# Altium PCB 板.PcbDoc (part 3 of 4)
Units mm, origin at the board's own origin, x right, y up, seen from the top; angles counter-clockwise.
Board outline 152.4 x 101.6 mm, 4 copper layers (Top Layer, VCC, GND, Bottom Layer); 183 components, 548 nets, 1331 pads, 689 vias.
Unrouted connection lines stored in the file: 6.
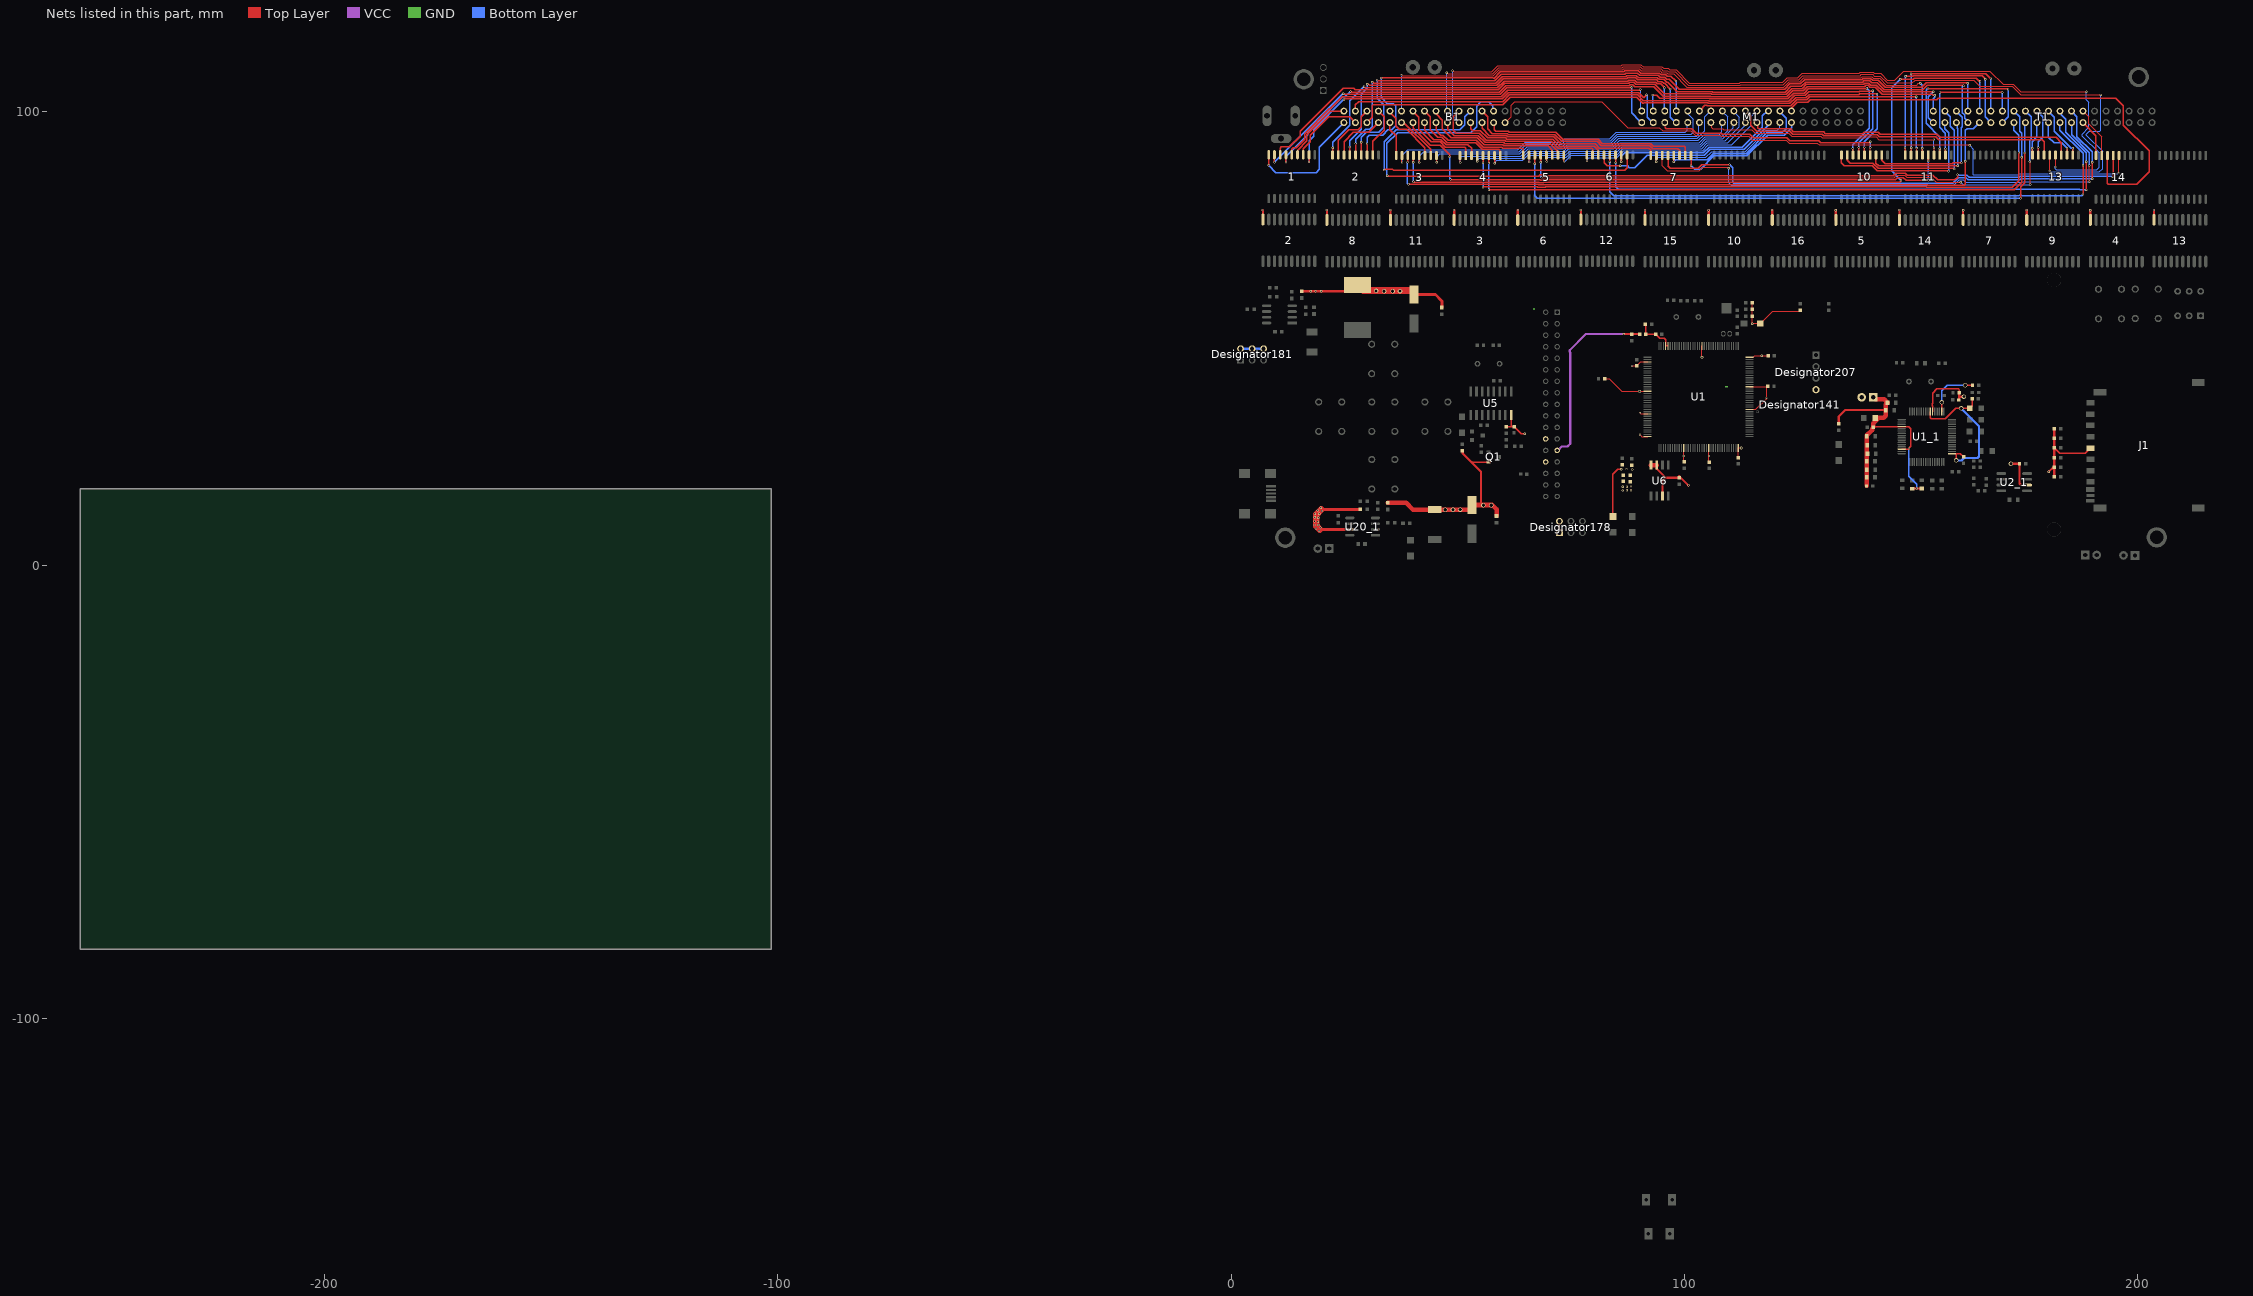
[diagram p5: the nets of this part, all layers, seen from the top]

## Via types
v1: diameter 0.5, hole 0.3, Top Layer to Bottom Layer, 646 vias
v2: diameter 1, hole 0.711, Top Layer to Bottom Layer, 35 vias
v3: diameter 0.5, hole 0.4, Top Layer to Bottom Layer, 2 vias
v4: diameter 1.27, hole 1.016, Top Layer to Bottom Layer, 2 vias
v5: diameter 1, hole 1, Top Layer to Bottom Layer, 2 vias
v6: diameter 3, hole 3, Top Layer to Bottom Layer, tented both sides, 2 vias

## Nets (pads, with @x,y where several pads share a name; then routed paths per layer and width w, separated by ;. In a path a pad name is that pad's centre, name@x,y a point inside that pad or via, vN(x,y) a via of type N, cw(c..) or ccw(c..) an arc to the next point about the centre after c; other vN are vias at no path point) (continued)
VCC3.3: C3_2.2 C4_2.1 C41.1 C42.2 C44.2 Designator141.24 Designator141.25 Designator178.1 Designator178.2 Designator207.4 J1.4 L8_1.2 P3_3.2 Q1.1 R3.2@90.069,50.902 R6_2.2 R10.1 R11.1 R20.1 R22.2 R24.2 R25.2 R27.2 R28.2 U6.3 U6.7 U6.8 | length 126.4
  Top Layer w0.3: 53.035,22.631 56.976,22.631 Q1.1@57.093,22.748 ; Designator178.1@72.39,7.112 Designator178.2@72.39,9.652 ; U6.7@93.853,21.209 U6.7@93.853,22.047 ; C41.1@98.806,19.228 C41.1@98.806,19.558 ; v1@100.787,17.577 v1(100.863,17.577) ; Designator207.4@128.524,38.202 Designator207.4@128.981,38.659 ; R27.2@181.342,21.576 R27.2@181.547,21.576 ; R25.2@181.547,25.813 182.722,24.638 188.34,24.638 J1.4@189.493,25.791
  Top Layer w0.5: v1(86.589,50.927) 90.044,50.927 R3.2@90.069,50.902 ; U6.7@93.853,21.209 95.834,19.228 ; U6.3@95.125,15.189 95.125,18.518 95.834,19.228 ; C41.1@98.806,19.228 95.834,19.228 ; C41.1@98.806,19.558 v1@100.787,17.577 ; v1(180.34,20.574) R27.2@181.342,21.576 ; R28.2@181.547,19.458 R27.2@181.547,21.576 C42.2@181.547,23.695 R25.2@181.547,25.813 R24.2@181.547,27.931 R22.2@181.547,30.05
  Top Layer w0.508: R20.1@50.925,25.209 51.052,25.082 51.052,24.614 53.035,22.631 55.118,20.549 55.118,13.335 v2@55.22,13.233
  Top Layer w1: R6_2.2@34.493,13.741 38.575,13.741 40.101,12.215 L8_1.2@44.933,12.215 47.219,12.215 48.92,12.215 v2(50.546,12.215) 52.637,12.215 53.137,12.715 C4_2.1@53.137,13.233 55.22,13.233 57.353,13.233 57.594,13.233 58.522,12.306 C3_2.2@58.522,10.822 ; U6.8@92.583,22.047 U6.7@93.853,22.047
  VCC w0.5: Designator141.25@71.901,25.275 72.091,25.275 72.932,26.116 74.173,26.116 74.778,26.721 74.778,46.852 74.662,46.968 74.662,47.382 78.207,50.927 v1(86.589,50.927)
  GND w0.3: 108.966,39.37 109.474,39.37
  other v1: 86.385,16.408 88.189,16.459 87.274,16.485 86.385,17.247 87.274,17.272 88.189,17.297
  other v2: 47.219,12.167 48.92,12.167 55.626,13.183 57.353,13.183
VCC3.3M: C11.1 C12.1 C13.1 C14.1 C15.1 C16.1 C17.1 C18.1 C19.1 C20.1 C21.1 C22.1 D1.1 D1_2.1 pad.15 pad.38 pad.41 R10.2 R11.2 R21.1 U1.17 U1.39 U1.52 U1.62 U1.72 U1.84 U1.95 U1.108 U1.121 U1.131 U1.144 | length 73.8
  Top Layer w0.254: C18.1@82.398,41.072 83.337,41.072 86.131,38.278 pad.38@90.068,38.278 90.102,38.312 U1.52@91.823,38.312 ; R10.2@87.987,19.774 R10.2@88,19.787 ; v1(88.392,43.917) C20.1@89.408,43.917 90.303,44.812 U1.39@91.823,44.812 ; v1(90.145,33.503) 90.336,33.312 U1.62@91.823,33.312 ; v1(90.17,28.743) 90.602,28.312 U1.72@91.823,28.312 ; U1.84@99.823,25.812 99.823,22.783 C17.1@100.051,22.555 ; pad.15@103.823,45.834 U1.17@103.823,48.312 ; U1.95@105.323,25.812 105.323,22.82 C16.1@105.461,22.682 ; C15.1@112.065,23.444 C15.1@111.823,23.686 U1.108@111.823,25.812 pad.41@112.491,25.812 ; U1.121@114.323,34.312 115.744,34.312 118.085,36.652 v1(118.085,36.855) 118.085,39.141 C11.1@118.255,39.312 ; U1.131@114.323,39.312 C11.1@118.255,39.312 ; U1.144@114.323,45.812 115.096,45.812 115.436,46.152 v1(117.018,46.152) 118.186,46.152 C12.1@118.44,45.898 ; C14.1@114.91,57.836 C19.1@114.91,56.388 C13.1@114.91,54.839 v1(114.91,53.188) 115.011,53.289 D1.1@116.688,53.289 116.967,53.569 117.067,53.569 119.48,55.982 125.247,55.982 R21.1@125.501,56.236 ; C11.1@118.339,39.395 C11.1@118.255,39.312
  Top Layer w0.3: D1_2.1@84.15,11.151 84.15,20.041 85.242,21.133 v1(86.03,21.133)
  other v1: 88.468,21.057 87.183,21.158 105.385,24.028 99.822,24.054
VCC5: 2.20 3.20 4.20 5.20 6.20 7.20 8.20 9.20 10.20 11.20 12.20 13.20 14.20 15.20 16.20 C3.2@46.431,56.796 C4.1@40.361,59.639 C32.1 C43.1 Designator141.28 Designator181.2 Designator181.4 Designator181.6 L8.2 R1_2.2 R6.1 U5.16 U20_1.7 | length 99.6
  Top Layer w0.3: C32.1@60.681,30.48 61.595,30.48 ; U5.16@61.747,33.036 61.747,30.632 61.595,30.48 ; C43.1@62.357,30.48 61.595,30.48 ; C43.1@62.382,30.505 63.932,28.956 v1(64.77,28.956)
  Top Layer w0.5: v1(6.934,78.283) 7.01,78.207 2.20@7.01,76.203 ; 8.20@21.11,76.101 v1@21.11,78.254 ; v1(35.077,78.283) 35.142,78.218 11.20@35.142,76.101 ; 3.20@49.174,76.101 v1@49.174,78.233 ; 6.20@63.206,76.101 v1@63.206,78.242 ; 12.20@77.14,76.203 v1@77.14,78.257 ; v1(91.262,78.257) 91.269,78.251 15.20@91.269,76.101 ; 10.20@105.301,76.101 v1@105.301,78.24 ; 16.20@119.332,76.101 v1@119.332,78.229 ; 5.20@133.364,76.101 v1@133.364,78.218 ; 14.20@147.396,76.101 v1@147.396,78.258 ; 7.20@161.427,76.101 v1@161.427,78.242 ; 9.20@175.459,76.101 175.459,78.253 v1(175.489,78.283) ; 4.20@189.491,76.101 v1@189.491,78.225 ; 13.20@203.53,76.126 v1@203.53,78.257
  Top Layer w0.635: R6.1@15.557,60.39 R6.1@15.545,60.377 26.472,60.377 L8.2@27.889,61.794 ; 19.533,7.849 U20_1.7@26.165,7.849 ; 19.863,12.268 R1_2.2@28.499,12.268 ; C4.1@40.361,59.639 45.034,59.639 46.457,58.217 46.457,56.821 C3.2@46.431,56.796
  Top Layer w1: L8.2@27.889,61.794 L8.2@29.139,60.544 ; C4.1@39.861,60.544 40.361,60.044 C4.1@40.361,59.639
  Top Layer w1.5: 19.533,7.849 18.771,8.611 18.771,11.176 19.863,12.268 ; L8.2@29.139,60.544 C4.1@39.861,60.544
  Bottom Layer w0.635: Designator181.2@2.083,47.701 Designator181.4@4.623,47.701 Designator181.6@7.163,47.701
  other v1: 19.355,7.518 18.694,8.077 19.685,8.255 19.177,8.814 18.364,8.839 19.126,9.55 18.364,9.652 19.177,10.414 18.415,10.516 19.406,11.278 18.466,11.298 20.015,11.913 19.101,12.04 19.761,12.624 18.618,60.35 19.837,60.35 17.551,60.376 105.283,78.257 133.325,78.257 161.442,78.257 189.459,78.257 21.082,78.283 49.124,78.283 63.246,78.283 77.114,78.283 119.278,78.283 147.371,78.283 203.505,78.283
  other v2: 35.611,60.376 33.731,60.401 37.236,60.427 31.953,60.452
VDD12: C2_1.2 C8_1.1 C9_1.2 U1_1.1 U1_1.23 | length 34.5
  Top Layer w0.254: C8_1.1@162.852,34.658 C8_1.1@162.916,34.595
  Top Layer w0.3: U1_1.23@154.191,33.846 154.191,32.485 154.367,32.309 157.505,32.309 159.766,34.569 160.998,34.569 162.763,34.569 C8_1.1@162.852,34.658 ; v2(159.893,23.063) 159.893,24.546 160.813,24.546 C2_1.2@161.52,23.838 ; C8_1.1@162.916,34.595 163.401,35.08 163.401,36.644 C9_1.2@163.411,36.654
  Bottom Layer w0.5: v2(159.893,23.063) 161.087,23.063 161.646,23.622 164.629,23.622 164.922,23.915 164.922,30.62 v2(160.998,34.544)
VDD33: C1.2@140.119,17.426 C3_1.2 C4_1.1 C5.2 C19_1.1 FB1.2 P3_3.1 R6_1.1 R8_1.1 R9.1 R11_1.1 R12_1.2 R14_1.1 R17_1.1 R18_1.1 R24_1.2 R30.1 RX1.1 U1_1.22 U1_1.36 U1_1.46 U2_1.6 | length 86.8
  Top Layer w0.3: C3_1.2@141.787,30.546 U1_1.36@147.891,30.546 149.418,30.546 149.911,30.052 149.911,26.162 149.294,25.546 U1_1.46@147.891,25.546 ; U1_1.22@154.691,33.846 154.691,35.013 154.591,35.113 154.591,35.61 154.691,35.71 154.691,37.877 155.651,38.837 160.426,38.837 160.63,38.633 160.63,38.024 C5.2@160.579,37.973 C5.2@160.547,37.941
  Top Layer w0.5: RX1.1@133.985,31.115 133.985,32.741 135.407,34.163 144.394,34.163 R24_1.2@144.402,34.163 ; C1.2@140.119,17.426 C1.2@140.164,17.47 ; R14_1.1@140.161,22.885 R14_1.1@140.186,22.86 ; R18_1.1@140.164,19.26 R18_1.1@140.208,19.304 R18_1.1@140.21,19.306 ; R14_1.1@140.186,22.607 R14_1.1@140.186,22.86 ; R11_1.1@140.21,28.396 R11_1.1@140.211,28.397 ; R14_1.1@140.277,22.769 140.21,22.836 R14_1.1@140.186,22.86 ; C3_1.2@141.787,30.546 141.872,30.631 141.872,31.483 ; R12_1.2@150.165,16.844 150.178,16.856 152.337,16.856 R8_1.1@152.349,16.869 ; FB1.2@160.515,36.397 160.547,36.428 160.547,37.135 ; C5.2@160.547,37.941 160.547,37.135 ; v2(161.595,37.135) 160.547,37.135 ; v2(171.983,22.352) C19_1.1@173.863,22.352 173.863,17.958 174.174,17.647 175.52,17.647 U2_1.6@175.539,17.628
  Top Layer w1: C1.2@140.164,17.47 R18_1.1@140.164,19.26 ; R18_1.1@140.21,19.306 140.21,22.836 R11_1.1@140.21,28.396 ; R11_1.1@140.211,28.397 140.211,28.604 141.34,29.733 141.34,30.099 C3_1.2@141.643,30.402 141.643,31.255 141.872,31.483 142.824,32.436 143.916,32.436 144.394,32.913 144.394,34.163 144.394,35.447 R30.1@144.758,35.812 144.032,36.538 142.024,36.538 P3_3.1@141.58,36.982
  Bottom Layer w0.3: v1(149.479,25.705) 149.479,19.533 151.206,17.805 v1(151.206,16.891)
VDDA: C9.2 C10.2 R3.1@91.453,50.9 U1.32 U1.33 | length 8.8
  Top Layer w0.3: C10.2@91.351,53.113 91.402,53.062 91.402,50.951 R3.1@91.453,50.9 ; R3.1@91.592,50.876 C9.2@93.61,50.876 ; C9.2@93.612,50.878 94.502,49.987 95.504,49.987 95.8,49.691 U1.33@95.8,48.335 ; U1.33@95.823,48.312 U1.32@96.3,48.312
VDDAMP: 
VIV: 
VREF: C16_1.1 U1_1.18 | length 11.4
  Top Layer w0.3: U1_1.18@156.691,33.846 156.691,35.434 v2@156.693,35.435 ; v2(161.9,39.624) C16_1.1@163.5,39.624
  Bottom Layer w0.3: v2(156.718,35.861) 156.718,38.379 157.963,39.624 v2(161.9,39.624)
VUSB:  | length 0
  GND w0.5: 66.802,56.439 66.802,56.464
W1: 1.18 B1.1 | length 27.1
  Top Layer w0.254: 1.18@8.255,90.246 8.382,90.373 1.18@8.28,90.475
  Top Layer w0.3: v1(8.255,88.138) 1.18@8.255,90.246
  Bottom Layer w0.3: v1(8.255,88.138) 9.83,86.563 18.771,86.563 19.456,87.249 19.456,92.159 B1.1@24.859,97.561
W2: 1.17 M1.1 | length 96.5
  Top Layer w0.3: v1(9.55,88.849) 1.17@9.55,90.475 ; v1(24.74,103.962) 24.91,103.792 25.373,103.792 25.384,103.781 59.352,103.781 60.804,105.234 88.19,105.234 v1(88.316,105.359)
  Bottom Layer w0.254: M1.1@90.551,97.587 M1.1@90.551,97.949
  Bottom Layer w0.3: v1@9.512,88.887 9.588,88.887 16.442,95.741 16.442,95.787 24.617,103.962 v1(24.74,103.962) ; v1(88.316,105.359) 88.316,99.712 M1.1@90.137,97.891 ; M1.1@90.195,97.231 90.094,97.333 M1.1@90.475,97.333
W3: 1.16 T1.1 | length 163
  Top Layer w0.3: 1.16@10.82,90.475 10.82,91.948 11.074,92.202 12.852,92.202 15.265,94.615 15.265,95.682 24.679,105.096 27.035,105.096 27.35,104.781 58.937,104.781 60.39,106.234 87.635,106.234 87.86,106.459 88.771,106.459 89.244,105.986 93.4,105.986 95.465,103.921 105.899,103.921 106.016,103.804 122.37,103.804 123.649,105.083 125.946,105.083 126.884,106.021 139.517,106.021 139.752,106.256 140.664,106.256 141.06,105.859 142.269,105.859 143.793,104.335 150.608,104.335 150.624,104.351 v1@154.729,104.351
  Bottom Layer w0.3: T1.1@154.856,97.561 153.744,98.673 153.744,103.274 v1(154.864,104.394)
W4: 1.15 T1.21 | length 160
  Top Layer w0.3: v1(12.09,88.748) 1.15@12.09,90.475 ; v1@26.314,104.546 26.378,104.483 26.58,104.281 59.144,104.281 60.597,105.734 87.842,105.734 88.067,105.959 88.564,105.959 89.037,105.486 93.193,105.486 95.258,103.421 105.692,103.421 105.809,103.304 122.577,103.304 123.856,104.583 126.153,104.583 127.091,105.521 139.724,105.521 139.959,105.756 140.457,105.756 140.808,105.405 140.808,105.359 142.062,105.359 143.586,103.835 150.815,103.835 150.831,103.851 154.543,103.851 154.788,103.607 v1(155.194,103.607)
  Bottom Layer w0.3: v1(12.09,88.748) 12.09,90.043 16.942,94.894 16.942,95.58 24.643,103.281 25.1,103.281 26.238,104.419 v1(26.314,104.419) ; T1.21@154.856,100.101 154.856,102.808 155.194,103.146 v1(155.194,103.607)
W5: 1.14 M1.21 | length 89.4
  Top Layer w0.3: 1.14@13.36,90.475 13.36,91.727 13.657,92.024 14.326,92.024 16.213,93.912 16.213,95.152 21.662,100.601 21.835,100.601 24.515,103.281 24.658,103.281 24.669,103.292 25.166,103.292 25.177,103.281 59.559,103.281 60.951,104.673 88.007,104.673 88.067,104.734 88.564,104.734 88.574,104.743 90.246,104.743 v1(90.246,104.877)
  Bottom Layer w0.254: v1(90.246,104.877) 90.319,104.804 M1.21@90.319,100.25 ; M1.21@90.377,99.589 90.449,99.517 M1.21@90.449,99.797
W6: 1.13 B1.21 | length 15.9
  Top Layer w0.2: B1.21@24.859,99.855 B1.21@24.859,100.101
  Top Layer w0.3: 1.13@14.63,90.475 14.63,91.516 16.713,93.599 16.713,94.945 21.869,100.101 B1.21@24.859,100.101
W7: 1.12 B1.2 | length 17.1
  Top Layer w0.254: B1.2@27.381,97.579 27.381,97.561 B1.2@27.399,97.561
  Top Layer w0.3: 1.12@15.9,90.475 15.9,91.77 17.475,93.345 17.475,94.767 21.565,98.857 26.103,98.857 B1.2@27.381,97.579
W8: 1.11 M1.2 | length 93.7
  Top Layer w0.3: v1(17.17,88.875) 1.11@17.17,90.475 1.11@17.17,90.678 ; v1(24.892,102.591) 25.082,102.781 59.766,102.781 61.158,104.173 89.845,104.173 90.964,103.054 v1(91.618,103.708)
  Bottom Layer w0.3: v1(17.17,88.875) 17.17,93.574 18.161,94.564 18.161,96.037 24.816,102.692 24.892,102.616 v1(24.892,102.591) ; v1(91.618,103.708) 91.77,103.556 91.77,98.798 M1.2@92.677,97.891 ; M1.2@92.735,97.231 92.667,97.3 M1.2@93.015,97.3
W9: 10.18@134.595,90.424 T1.2 | length 37.8
  Top Layer w0.254: 10.18@134.595,90.424 10.18@134.595,91.135
  Top Layer w0.3: 10.18@134.595,90.424 134.595,88.722 135.255,88.062 141.385,88.062 142.465,86.982 v1@158.217,86.982
  Bottom Layer w0.3: T1.2@157.396,97.561 157.396,96.172 158.217,95.352 v1(158.217,86.843)
W10: 10.17@135.865,90.424 T1.22 | length 39.1
  Top Layer w0.3: 10.17@135.865,90.424 135.865,89.226 136.483,88.608 141.546,88.608 142.672,87.482 v1@159.461,87.482
  Bottom Layer w0.3: T1.22@157.396,100.101 158.59,98.908 158.59,96.807 159.461,95.936 v1(159.461,87.351)
W11: 10.16@137.135,90.424 M1.22 | length 67.8
  Top Layer w0.254: 10.16@137.109,90.424 10.16@137.135,90.424
  Top Layer w0.3: v1(93.007,103.657) 93.825,103.657 94.562,102.921 105.485,102.921 105.602,102.804 122.784,102.804 124.063,104.083 126.36,104.083 127.298,105.021 140.073,105.021 v1(140.208,105.156) ; 10.16@137.109,90.424 v1@137.109,91.77
  Bottom Layer w0.3: M1.22@93.007,100.787 v1(93.007,103.657) ; v1(137.109,91.872) 137.109,92.634 140.767,96.291 140.767,104.597 v1(140.208,105.156)
W12: 10.15@138.405,90.424 B1.22 | length 134.1
  Top Layer w0.3: B1.22@27.399,100.101 27.399,101.516 28.085,102.202 59.894,102.202 61.365,103.673 89.638,103.673 90.89,102.421 105.278,102.421 105.395,102.304 122.992,102.304 124.27,103.583 126.567,103.583 127.396,104.411 138.574,104.411 138.684,104.521 141.453,104.521 v1(141.503,104.572) ; 10.15@138.405,89.662 10.15@138.405,90.424 v1@138.405,92.024
  Bottom Layer w0.3: v1(138.405,92.075) 138.405,93.116 141.478,96.19 141.478,102.057 141.478,102.689 v1(141.503,104.572)
W13: 10.14@139.675,90.424 B1.3 | length 133.1
  Top Layer w0.3: B1.3@29.939,97.561 31.166,98.788 31.166,101.371 31.344,101.549 59.948,101.549 61.572,103.173 89.431,103.173 90.758,101.846 90.942,101.846 91.017,101.921 105.071,101.921 105.188,101.804 123.199,101.804 124.478,103.083 126.774,103.083 127.451,103.759 138.434,103.759 138.586,103.911 v1@142.457,103.911 ; 10.14@139.675,89.84 10.14@139.675,90.424 v1@139.675,92.126
  Bottom Layer w0.3: v1(139.675,92.1) 139.675,93.396 142.443,96.164 v1(142.443,103.886)
W14: 10.13@140.945,90.424 M1.3 | length 50.8
  Top Layer w0.254: M1.3@95.631,97.587 95.682,97.536 95.682,96.444 ; 10.13@140.945,90.424 v1(140.945,92.075)
  Top Layer w0.3: 95.682,96.444 95.917,96.208 101.607,96.208 102.609,95.206 108.064,95.206 108.28,94.99 114.407,94.99 115.188,94.209 122.567,94.209 123.203,93.574 129.565,93.574 129.985,93.154 140.76,93.154 v1(140.945,93.339)
  Bottom Layer w0.3: v1(140.945,92.075) v1(140.945,93.339)
W15: 10.12@142.215,90.424 T1.3 | length 30.2
  Top Layer w0.254: T1.3@159.578,97.561 T1.3@159.936,97.561
  Top Layer w0.3: 10.12@142.215,90.424 142.215,88.646 142.832,88.029 143.994,88.029 144.02,88.003 159.138,88.003 159.164,88.029 v1@160.325,88.029
  Bottom Layer w0.3: T1.3@159.936,97.561 160.14,97.357 160.14,96.349 160.249,96.241 v1(160.249,88.062)
W16: 10.11@143.485,90.424 T1.23 | length 31.8
  Top Layer w0.254: 10.11@143.485,90.424 143.678,90.617 10.11@143.678,90.952
  Top Layer w0.3: 10.11@143.485,90.424 143.485,89.245 144.227,88.503 158.931,88.503 158.957,88.529 159.075,88.529 159.243,88.697 v1(161.061,88.697)
  Bottom Layer w0.3: T1.23@159.936,100.101 161.239,98.798 161.239,96.647 161.061,96.469 v1(161.061,88.697)
W17: 2.18@22.352,90.449 M1.23 | length 90.8
  Top Layer w0.254: v1@22.352,92.024 v1(22.377,92.05)
  Top Layer w0.3: 2.18@22.352,90.449 v1@22.352,92.024 ; v1(29.312,105.486) 29.517,105.281 58.73,105.281 60.183,106.734 87.428,106.734 87.653,106.959 88.979,106.959 89.452,106.486 93.607,106.486 93.972,106.121 94.793,106.121 95.555,105.359 v1(95.555,105.283)
  Bottom Layer w0.3: v1(22.377,92.05) 22.377,93.218 26.111,96.952 26.111,102.362 29.312,105.562 v1(29.312,105.486) ; M1.23@95.555,100.787 v1(95.555,105.283) ; M1.23@95.613,99.644 M1.23@95.613,100.127
W18: 2.17@23.622,90.449 B1.23 | length 13.9
  Top Layer w0.254: B1.23@29.939,99.739 B1.23@29.939,100.101
  Top Layer w0.3: 2.17@23.622,90.449 23.622,93.675 25.984,96.037 28.067,96.037 28.677,96.647 28.677,98.839 B1.23@29.939,100.101
W19: 2.16@24.892,90.449 B1.4 | length 12.2
  Top Layer w0.3: 2.16@24.892,90.449 24.892,93.345 26.975,95.428 30.345,95.428 B1.4@32.479,97.561
W20: 2.15@26.162,90.449 M1.4 | length 93.7
  Top Layer w0.3: 2.15@26.162,90.449 v1(26.162,92.202) ; v1(30.023,106.045) 30.258,106.045 30.522,105.781 58.523,105.781 59.976,107.234 87.221,107.234 87.446,107.459 89.186,107.459 89.659,106.986 93.814,106.986 94.179,106.621 95,106.621 95.389,106.232 95.596,106.232 v1(96.85,104.978)
  Bottom Layer w0.3: v1(26.162,92.202) 26.162,93.574 28.689,96.101 28.689,103.873 30.023,105.207 v1(30.023,106.045) ; v1(96.85,104.978) 96.85,98.798 M1.4@97.757,97.891 ; M1.4@97.815,97.231 97.747,97.3 M1.4@98.069,97.3
W21: 2.14@27.432,90.449 T1.4 | length 161.9
  Top Layer w0.3: 2.14@27.432,90.449 v1(27.432,92.939) ; v1(31.14,106.502) 31.214,106.502 31.435,106.281 58.316,106.281 59.769,107.734 87.013,107.734 87.239,107.959 89.393,107.959 89.866,107.486 94.021,107.486 94.386,107.121 95.414,107.121 96.033,106.502 96.317,106.502 98.398,104.421 106.106,104.421 106.223,104.304 122.163,104.304 123.442,105.583 125.739,105.583 126.677,106.521 139.31,106.521 139.545,106.756 140.871,106.756 141.252,106.375 142.494,106.375 144.034,104.835 150.401,104.835 150.416,104.851 152.494,104.851 153.467,105.824 161.384,105.824 v1(161.519,105.689)
  Bottom Layer w0.3: v1(27.432,92.939) 27.432,93.904 29.642,96.114 30.607,96.114 31.217,96.723 31.14,96.799 v1(31.14,106.502) ; v1(161.519,105.689) 161.29,105.461 161.29,99.715 161.739,99.265 161.739,98.538 162.476,97.802 T1.4@162.476,97.561
W22: 2.13@28.702,90.449 T1.24 | length 162
  Top Layer w0.254: 2.13@28.55,90.297 2.13@28.702,90.449
  Top Layer w0.3: 2.13@28.702,90.449 v1(28.702,93.218) ; v1(32.182,106.959) 32.36,106.781 58.109,106.781 59.562,108.234 86.806,108.234 87.032,108.459 89.6,108.459 90.073,107.986 94.228,107.986 94.593,107.621 95.621,107.621 96.105,107.137 96.596,107.137 98.812,104.921 106.313,104.921 106.33,104.904 122.057,104.904 123.248,106.096 125.545,106.096 126.47,107.021 139.103,107.021 139.338,107.256 141.078,107.256 141.459,106.875 142.701,106.875 144.241,105.335 150.194,105.335 150.209,105.351 152.286,105.351 153.26,106.324 162.374,106.324 v1(162.476,106.223)
  Bottom Layer w0.3: v1(28.702,93.218) 28.702,94.31 29.832,95.44 32.575,95.44 33.706,96.571 33.706,101.473 32.182,102.997 v1(32.182,106.959) ; T1.24@162.476,100.101 162.42,100.157 162.42,106.167 v1(162.476,106.223)
W23: 2.12@29.972,90.449 M1.24 | length 97.7
  Top Layer w0.3: 2.12@29.972,90.449 v1(29.972,92.939) ; v1(33.096,107.417) 57.766,107.417 57.902,107.281 59.355,108.734 86.599,108.734 86.825,108.959 89.807,108.959 90.28,108.486 94.435,108.486 94.8,108.121 95.829,108.121 96.135,107.815 96.985,107.815 98.044,106.756 v1(98.12,106.756)
  Bottom Layer w0.3: v1(29.972,92.939) 29.972,94.31 30.48,94.818 33.376,94.818 34.519,95.961 35.382,95.961 36.246,96.825 36.246,101.244 35.763,101.727 34.468,101.727 33.071,103.124 v1@33.071,107.467 ; M1.24@98.12,100.49 v1(98.12,106.756) ; M1.24@98.179,99.83 98.534,99.83 98.357,99.652 M1.24@98.179,99.83
W24: 2.11@31.242,90.449 B1.24 | length 11.2
  Top Layer w0.3: 2.11@31.242,90.449 31.242,93.421 33.731,95.91 33.731,98.849 B1.24@32.479,100.101
W25: 3.18@36.398,90.348 B1.5 | length 7.8
  Top Layer w0.3: B1.5@35.019,97.561 35.019,96.045 36.398,94.666 3.18@36.398,90.348
W26: 3.17@37.668,90.348 M1.5 | length 70
  Top Layer w0.254: v1@37.668,88.798 v1@37.668,88.824 ; 3.17@37.668,90.348 v1@37.668,88.824 ; v1(37.694,88.798) v1@37.668,88.824
  Bottom Layer w0.254: v1(37.694,88.798) 37.694,90.322 38.957,91.586 63.189,91.586 64.821,93.218 72.715,93.218 73.527,94.031 83.488,94.031 84.911,95.453 100.152,95.453 100.627,95.928 M1.5@100.627,97.561
W27: 3.16@38.938,90.348 T1.5 | length 145.2
  Top Layer w0.254: T1.5@164.922,97.561 T1.5@165.016,97.561
  Top Layer w0.3: v1(38.887,88.849) 38.913,88.875 38.913,90.322 3.16@38.938,90.348 ; v1@39.236,83.929 67.707,83.929 67.79,83.846 69.116,83.846 69.184,83.914 153.515,83.914 153.65,83.779 161.706,83.779 161.9,83.972 v1(161.9,89.052)
  Bottom Layer w0.3: v1(38.887,88.849) 38.887,84.23 39.116,84.001 v1(39.116,83.947) ; v1(161.9,89.052) 161.9,95.834 162.306,96.241 163.695,96.241 T1.5@165.016,97.561
W28: 3.15@40.208,90.348 T1.25 | length 162.2
  Top Layer w0.3: v1(40.183,88.824) 40.196,88.837 40.196,90.335 3.15@40.208,90.348 ; v1@40.208,84.607 40.387,84.429 67.914,84.429 67.997,84.346 68.909,84.346 68.992,84.429 147.472,84.429 147.726,84.684 v1(147.726,84.861) ; v1(147.574,107.137) 150.382,107.137 150.623,107.378 164.361,107.378 v1@165.016,106.723
  Bottom Layer w0.3: v1(40.183,88.824) 40.195,88.811 40.195,84.544 v1(40.208,84.531) ; v1(147.574,107.137) 145.644,105.207 145.644,86.944 v1(147.726,84.861) ; T1.25@165.016,100.101 165.138,100.223 165.138,106.642 v1(165.176,106.68)
W29: 3.14@41.478,90.348 M1.25 | length 70.3
  Top Layer w0.3: v1(41.478,88.798) 3.14@41.478,90.348
  Bottom Layer w0.254: v1(41.478,88.798) 41.478,90.17 42.44,91.132 63.49,91.132 65.119,92.761 72.899,92.761 73.715,93.577 83.676,93.577 85.099,94.999 101.518,94.999 101.93,95.412 101.93,98.323 M1.25@100.627,99.627
W30: 3.13@42.748,90.348 B1.25 | length 13.9
  Top Layer w0.2: B1.25@35.019,99.881 B1.25@35.019,100.101
  Top Layer w0.3: B1.25@35.019,99.881 36.322,98.577 36.322,96.825 37.084,96.063 38.684,96.063 42.748,91.999 3.13@42.748,90.348
W31: 3.12@44.018,90.348 B1.6 | length 10.2
  Top Layer w0.254: B1.6@37.559,97.561 B1.6@38.1,97.561
  Top Layer w0.3: B1.6@38.1,97.561 44.018,91.643 3.12@44.018,90.348
W32: 3.11@45.288,90.348 M1.6 | length 65.2
  Top Layer w0.254: v1@45.288,88.697 3.11@45.288,90.348
  Bottom Layer w0.254: v1(45.339,88.824) 45.339,89.967 46.05,90.678 63.678,90.678 65.275,92.275 73.056,92.275 73.903,93.123 83.864,93.123 85.287,94.545 102.648,94.545 103.167,95.064 M1.6@103.167,97.561
W33: 11.18@148.666,90.424 T1.6 | length 46
  Top Layer w0.254: T1.6@167.437,97.561 T1.6@167.556,97.561
  Top Layer w0.3: v1(148.615,92.05) 148.641,92.024 148.641,90.449 11.18@148.666,90.424 ; v1(148.768,107.772) 148.784,107.756 150.294,107.756 150.416,107.878 165.68,107.878 v1@166.37,107.188 ; T1.6@167.437,97.561 T1.6@167.437,97.68
  Bottom Layer w0.3: v1(148.615,92.05) 148.615,107.925 v1(148.768,107.772) ; v1(166.294,107.127) 166.294,98.823 T1.6@167.556,97.561
W34: 11.17@149.936,90.424 T1.26 | length 43.2
  Top Layer w0.3: 11.17@149.936,90.424 149.949,90.437 149.949,91.986 v1(149.962,91.999) ; v1(149.936,108.356) 149.958,108.378 166.475,108.378 v1@167.556,107.297
  Bottom Layer w0.3: v1(149.936,108.356) 149.962,108.331 v1(149.962,91.999) ; T1.26@167.556,100.101 v1(167.556,107.315)
W35: 11.16@151.206,90.424 M1.26 | length 62.2
  Top Layer w0.254: 11.16@151.206,90.424 v1(151.206,91.948)
  Top Layer w0.3: M1.26@103.226,99.441 M1.26@103.581,99.797 ; M1.26@103.523,100.457 104.487,101.421 104.863,101.421 104.981,101.304 123.406,101.304 124.685,102.583 126.981,102.583 127.65,103.251 v1(151.079,103.251)
  Bottom Layer w0.3: v1(151.079,103.251) 151.079,92.129 151.206,92.002 v1(151.206,91.948)
W36: 11.15@152.476,90.424 B1.26 | length 142.8
  Top Layer w0.254: v1(37.541,108.052) 37.699,107.894 57.84,107.894 59.157,109.211 86.402,109.211 86.627,109.436 90.005,109.436 90.478,108.963 94.633,108.963 94.998,108.598 96.026,108.598 96.319,108.306 97.587,108.306 100.494,105.398 106.511,105.398 106.528,105.381 113.042,105.381 ; 113.042,105.359 121.844,105.385 123.032,106.573 125.347,106.573 126.272,107.498 138.906,107.498 139.141,107.733 141.275,107.733 141.656,107.352 142.99,107.352 144.501,105.842 151.17,105.842 151.555,106.227 151.921,106.227 v1(151.968,106.274)
  Top Layer w0.3: v1(152.425,91.923) 152.451,91.897 152.451,90.449 11.15@152.476,90.424
  Bottom Layer w0.254: B1.26@37.559,100.101 37.588,100.13 v1@37.588,108.052
  Bottom Layer w0.3: v1(151.968,106.274) 152.425,105.816 v1(152.425,91.923)
W37: 11.14@153.746,90.424 B1.7 | length 128.8
  Top Layer w0.3: B1.7@40.099,97.561 40.176,97.484 40.176,96.349 43.942,92.583 46.1,92.583 48.177,90.505 v1(48.177,90.018) ; v1(48.387,85.039) 48.425,85.001 48.603,85.001 48.675,84.929 68.121,84.929 68.204,84.846 68.702,84.846 68.785,84.929 146.448,84.929 146.98,85.461 148.269,85.461 148.844,84.887 v1(153.797,84.887) ; v1(153.746,89.103) 11.14@153.746,90.424
  Bottom Layer w0.3: v1(48.177,90.018) 48.177,85.303 48.387,85.093 v1(48.387,85.039) ; v1(153.746,89.103) 153.772,89.078 153.772,84.912 v1(153.797,84.887)
W38: 11.13@155.016,90.424 M1.7 | length 54.9
  Top Layer w0.254: M1.7@105.791,97.587 105.994,97.384 105.994,96.444 106.255,96.183 108.469,96.183 108.684,95.967 114.812,95.967 115.593,95.186 122.972,95.186 123.608,94.551 130.036,94.551 130.404,94.183 139.864,94.183 140.112,94.432 142.22,94.432 142.824,93.828 v1(154.991,93.828) ; 11.13@155.016,90.424 v1(155.016,92.02)
  Bottom Layer w0.254: v1(154.991,93.828) 155.004,93.815 155.004,92.033 v1(155.016,92.02)
W39: 11.12@156.286,90.424 T1.7 | length 42
  Top Layer w0.254: T1.7@169.738,97.561 T1.7@170.096,97.561
  Top Layer w0.3: v1(153.67,105.105) 153.686,105.089 171.11,105.089 v1(171.348,104.851) ; v1(156.261,91.796) 156.274,91.783 156.274,90.437 11.12@156.286,90.424
  Bottom Layer w0.3: v1@153.568,105.029 153.244,104.705 153.244,97.403 156.261,94.386 v1(156.261,91.796) ; T1.7@170.096,97.561 171.374,98.839 171.374,100.838 171.348,100.863 v1(171.348,104.851)
W40: 11.11@157.556,90.424 T1.27 | length 32.9
  Top Layer w0.3: v1(156.312,104.216) 156.312,104.165 156.362,104.115 156.464,104.216 v1(170.053,104.216) ; v1(157.531,91.821) 157.544,91.808 157.544,90.437 11.11@157.556,90.424 157.726,90.594 11.11@157.726,90.961
  Bottom Layer w0.3: v1(156.312,104.216) 156.286,104.191 156.286,100.863 156.284,100.861 156.284,96.522 157.531,95.275 v1(157.531,91.821) ; v1(170.053,104.216) 170.078,104.191 170.078,101.143 170.096,101.125 T1.27@170.096,100.101
W41: 4.18@50.47,90.322 M1.27 | length 63.9
  Top Layer w0.254: 4.18@50.47,90.322 50.495,90.297 v1(50.495,88.773)
  Bottom Layer w0.254: v1(50.495,88.773) 50.495,89.789 50.876,90.17 63.869,90.17 65.47,91.77 73.193,91.77 74.091,92.669 84.052,92.669 85.475,94.091 102.836,94.091 104.47,95.726 104.47,98.864 M1.27@105.707,100.101
W42: 4.17@51.74,90.322 B1.27 | length 18.9
  Top Layer w0.3: B1.27@40.099,100.101 41.402,98.798 41.402,96.051 44.134,93.32 46.07,93.32 47.239,92.151 51.46,92.151 51.74,91.872 4.17@51.74,90.322 4.17@51.74,89.599
W43: 4.16@53.01,90.322 B1.8 | length 15.3
  Top Layer w0.3: B1.8@42.639,97.561 42.639,95.842 44.661,93.82 46.277,93.82 47.446,92.651 52.23,92.651 53.01,91.872 4.16@53.01,90.322
W44: 4.15@54.28,90.322 M1.8 | length 60.1
  Top Layer w0.254: v1(54.28,89.027) 4.15@54.28,90.322
  Bottom Layer w0.254: v1(54.28,89.027) 54.28,89.281 54.712,89.713 64.054,89.713 65.604,91.262 73.327,91.262 74.279,92.215 84.24,92.215 85.663,93.637 103.024,93.637 104.332,94.945 107.671,94.945 108.247,95.522 M1.8@108.247,97.561
W45: 4.14@55.55,90.322 T1.8 | length 139.3
  Top Layer w0.3: v1(55.55,83.261) 55.702,83.414 67.515,83.414 67.583,83.346 69.323,83.346 69.391,83.414 153.308,83.414 153.443,83.279 172.28,83.279 173.736,84.734 v1(173.736,90.957) ; v1(55.55,88.697) 4.14@55.55,90.322
  Bottom Layer w0.3: v1(55.55,83.261) v1(55.55,88.697) ; T1.8@172.636,97.561 172.636,95.893 173.736,94.793 v1(173.736,90.957)
W46: 4.13@56.82,90.322 T1.28 | length 142.1
  Top Layer w0.3: v1(56.845,82.779) 172.695,82.779 174.346,84.43 v1(174.346,89.941) ; v1(56.845,88.646) 4.13@56.845,90.195 ; T1.28@172.636,99.982 T1.28@172.636,100.101
  Bottom Layer w0.3: v1(56.845,82.779) v1(56.845,88.646) ; T1.28@172.636,100.101 173.914,98.823 173.914,95.631 174.346,95.199 v1(174.346,89.941)
W47: 4.12@58.09,90.322 M1.28 | length 61.1
  Top Layer w0.3: 4.12@58.09,90.322 58.102,90.31 58.102,88.608 v1(58.115,88.595)
  Bottom Layer w0.254: v1(58.115,88.595) 58.115,88.798 58.565,89.248 64.349,89.248 65.9,90.799 73.505,90.799 74.467,91.761 84.428,91.761 85.851,93.183 103.212,93.183 104.52,94.491 108.233,94.491 109.499,95.758 109.499,98.849 M1.28@108.247,100.101
W48: 4.11@59.36,90.322 B1.28 | length 23.2
  Top Layer w0.254: B1.28@42.639,100.101 B1.28@42.825,100.101
  Top Layer w0.3: B1.28@42.825,100.101 42.825,99.915 43.866,98.874 43.866,95.961 45.507,94.32 46.484,94.32 47.653,93.151 53.889,93.151 55.352,91.688 59.088,91.688 59.264,91.513 59.264,91.213 59.36,91.117 4.11@59.36,90.322
W49: 5.18@64.44,90.399 B1.9 | length 24
  Top Layer w0.3: B1.9@45.179,97.561 45.179,95.908 46.268,94.82 46.691,94.82 47.86,93.651 54.097,93.651 55.559,92.188 59.704,92.188 59.944,91.948 64.211,91.948 64.387,91.772 64.387,90.451 5.18@64.44,90.399
W50: 5.17@65.71,90.399 M1.9 | length 51.5
  Top Layer w0.254: 5.17@65.71,90.399 65.722,90.386 65.722,88.887 v1(65.735,88.875)
  Bottom Layer w0.254: v1(65.735,88.875) 65.735,89.992 66.088,90.345 73.693,90.345 74.655,91.307 84.616,91.307 86.039,92.729 103.4,92.729 104.708,94.037 108.421,94.037 110.787,96.404 M1.9@110.787,97.561
W51: 5.16@66.98,90.399 T1.9 | length 133.5
  Top Layer w0.3: v1(66.954,88.494) 66.954,90.373 5.16@66.98,90.399 ; v1(174.092,80.899) 174.092,83.448 174.976,84.332 174.981,84.328 v1(174.981,90.881) ; T1.9@175.176,97.561 T1.9@175.193,97.545
  Bottom Layer w0.3: v1(66.954,88.494) 66.98,88.468 66.98,81.458 67.539,80.899 v1(174.092,80.899) ; v1(174.981,90.881) 174.981,91.077 175.006,91.051 175.006,97.391 T1.9@175.176,97.561
W52: 5.15@68.25,90.399 T1.29 | length 130.7
  Top Layer w0.254: v1(68.453,85.446) 68.493,85.406 146.188,85.406 146.721,85.938 148.504,85.938 148.946,85.496 154.381,85.496 155.473,84.404 v1(160.884,84.404) ; v1(176.098,88.976) 176.225,88.849 v1@176.225,83.972
  Top Layer w0.3: 5.15@68.25,90.399 68.262,90.386 68.262,88.837 v1(68.275,88.824)
  Bottom Layer w0.254: v1(160.884,84.404) 160.934,84.404 161.422,83.917 v1(176.225,83.917)
  Bottom Layer w0.3: v1(68.275,88.824) 68.275,85.678 68.453,85.5 v1(68.453,85.446) ; T1.29@175.176,100.101 176.403,98.874 176.403,93.965 176.098,93.66 v1(176.098,88.976)
W53: 5.14@69.52,90.399 M1.29 | length 51.4
  Top Layer w0.254: 5.14@69.52,90.399 69.558,90.36 69.558,89.04 v1(69.596,89.002)
  Bottom Layer w0.254: v1(69.596,89.002) 69.647,89.052 69.647,89.56 69.977,89.891 73.882,89.891 74.844,90.853 84.805,90.853 86.227,92.275 103.588,92.275 104.861,93.548 108.988,93.548 112.09,96.651 112.09,98.798 M1.29@110.787,100.101
W54: 5.13@70.79,90.399 B1.29 | length 31.5
  Top Layer w0.2: B1.29@45.179,99.5 B1.29@45.179,100.101
  Top Layer w0.3: B1.29@45.179,99.5 46.558,98.12 46.558,96.2 48.544,94.215 54.324,94.215 55.851,92.688 59.911,92.688 60.151,92.448 69.934,92.448 70.757,91.626 5.13@70.757,90.729
W55: 5.12@72.06,90.399 B1.10 | length 28.6
  Top Layer w0.3: B1.10@47.719,97.561 47.719,96.147 49.151,94.715 54.532,94.715 56.058,93.188 60.118,93.188 60.358,92.948 70.349,92.948 72.06,91.237 5.12@72.06,90.399
W56: 5.11@73.33,90.399 M1.10 | length 45.3
  Top Layer w0.254: 5.11@73.33,90.399 73.368,90.36 73.368,89.014 v1(73.406,88.976)
  Bottom Layer w0.254: v1(73.406,88.976) 73.609,88.976 75.032,90.399 84.993,90.399 86.415,91.821 103.776,91.821 105.049,93.094 109.477,93.094 M1.10@113.327,96.944 ; M1.10@113.327,97.3 M1.10@113.327,97.917
W57: 13.18@176.729,90.42 T1.10 | length 7.6
  Top Layer w0.3: v1(176.704,91.944) 176.716,91.931 176.716,90.433 13.18@176.729,90.42
  Bottom Layer w0.3: v1@176.708,91.948 176.708,93.396 177.716,94.404 T1.10@177.716,97.561
W58: 13.17@177.999,90.42 T1.30 | length 10.6
  Top Layer w0.3: 13.17@177.999,90.42 v1(177.999,92.096)
  Bottom Layer w0.3: T1.30@177.716,100.101 178.994,98.823 178.994,94.361 178.003,93.37 v1@178.003,92.1
W59: 13.16@179.269,90.42 M1.30 | length 73
  Top Layer w0.3: M1.30@113.411,100.127 114.579,98.958 114.579,96.977 115.893,95.663 123.17,95.663 123.805,95.028 130.347,95.028 130.714,94.66 139.542,94.66 139.802,94.92 142.469,94.92 142.961,94.428 155.407,94.428 156.02,93.815 178.829,93.815 179.269,93.375 179.269,92.02 13.16@179.269,90.42
W60: 13.15@180.539,90.42 B1.30 | length 194.6
  Top Layer w0.254: v1(47.549,108.56) 47.761,108.348 57.652,108.348 58.969,109.665 86.214,109.665 86.439,109.89 90.193,109.89 90.666,109.417 94.821,109.417 95.186,109.052 96.214,109.052 96.507,108.76 97.946,108.76 100.853,105.852 106.699,105.852 106.716,105.835 112.32,105.835 112.407,105.921 121.739,105.921 122.844,107.027 125.159,107.027 126.084,107.952 138.718,107.952 138.953,108.187 141.463,108.187 141.844,107.806 143.178,107.806 144.66,106.324 150.244,106.324 150.821,106.901 163.761,106.901 165.096,105.566 172.284,105.566 174.168,103.683 v1(191.77,103.683) ; v1(180.539,86.898) 13.15@180.539,90.42
  Bottom Layer w0.254: v1(47.549,108.56) 47.549,100.287 47.727,100.109 B1.30@47.719,100.101 ; v1@180.594,86.868 180.765,86.697 191.472,86.697 192.202,87.427 192.202,91.237 188.62,94.818 188.62,95.047 189.23,95.656 191.516,95.656 191.795,95.936 191.795,103.784 191.77,103.759 v1(191.77,103.683)
W61: 13.14@181.809,90.42 B1.11 | length 190.9
  Top Layer w0.254: v1(48.819,108.991) 48.819,109.055 49.072,108.802 57.464,108.802 58.781,110.119 86.026,110.119 86.251,110.344 90.381,110.344 90.854,109.871 95.009,109.871 95.374,109.506 96.402,109.506 96.695,109.214 98.134,109.214 101.041,106.306 106.887,106.306 106.904,106.289 112.132,106.289 112.329,106.486 121.661,106.486 122.656,107.481 124.971,107.481 125.898,108.407 138.531,108.407 138.764,108.641 141.652,108.641 141.885,108.407 143.219,108.407 144.667,106.959 146.329,106.959 148.303,108.933 167.342,108.933 170.255,106.02 172.472,106.02 174.124,104.369 v1(188.62,104.369) ; v1(181.809,87.782) 13.14@181.809,90.42
  Bottom Layer w0.254: v1(48.819,108.991) 48.819,99.001 B1.11@50.259,97.561 ; v1@181.788,87.909 181.788,87.351 181.966,87.173 190.906,87.173 191.44,87.706 191.44,90.881 187.706,94.615 187.706,95.021 189.179,96.495 189.179,102.083 188.62,102.641 v1(188.62,104.369)
W62: 13.13@183.079,90.42 M1.11 | length 72.5
  Top Layer w0.3: M1.11@115.951,97.587 116.096,97.442 116.096,96.375 116.308,96.163 123.377,96.163 124.011,95.529 130.644,95.529 131.013,95.16 139.335,95.16 139.594,95.42 142.738,95.42 143.151,95.007 155.645,95.007 156.337,94.315 181.936,94.315 183.079,93.171 13.13@183.079,90.42
W63: 13.12@184.349,90.42 T1.11 | length 9.8
  Top Layer w0.3: 13.12@184.349,90.42 v1(184.349,91.944)
  Bottom Layer w0.3: T1.11@180.256,97.561 180.256,94.369 181.483,93.142 183.159,93.142 v1@184.353,91.948
W64: 13.11@185.619,90.42 T1.31 | length 12.1
  Top Layer w0.3: 13.11@185.619,90.42 185.632,90.433 185.632,91.906 v1(185.644,91.918)
  Bottom Layer w0.3: T1.31@180.256,100.101 181.559,98.798 181.559,95.631 185.268,91.923 v1@185.649,91.923
W65: 6.18@78.435,90.424 M1.31 | length 44.6
  Top Layer w0.254: 6.18@78.435,90.424 78.486,90.373 v1(78.486,89.129)
  Bottom Layer w0.254: v1(78.486,89.129) 78.486,89.433 78.842,89.789 85.025,89.789 86.603,91.367 103.964,91.367 105.237,92.64 110.395,92.64 114.63,96.876 114.63,98.864 M1.31@115.867,100.101
W66: 6.17@79.705,90.424 B1.31 | length 38.9
  Top Layer w0.2: B1.31@50.259,99.685 B1.31@50.259,100.101
  Top Layer w0.3: B1.31@50.259,100.101 48.971,98.814 48.971,95.936 49.692,95.215 54.739,95.215 56.265,93.688 60.325,93.688 60.565,93.448 70.631,93.448 72.156,91.923 79.553,91.923 79.705,91.77 6.17@79.705,90.424
W67: 6.16@80.975,90.424 B1.12 | length 32.5
  Top Layer w0.3: B1.12@52.799,97.561 52.799,96.223 53.264,95.758 54.966,95.758 56.535,94.188 60.532,94.188 60.772,93.948 70.898,93.948 72.453,92.392 ; 72.466,92.405 80.039,92.405 80.975,91.469 6.16@80.975,90.424
W68: 6.15@82.245,90.424 M1.12 | length 42.8
  Top Layer w0.3: 6.15@82.245,90.424 82.245,88.697 82.906,88.036 v1(85.827,88.036)
  Bottom Layer w0.3: v1(85.827,88.036) 87.427,88.036 87.833,87.63 89.027,87.63 91.787,90.39 104.369,90.39 105.642,91.663 113.152,91.663 118.389,96.901 M1.12@118.389,97.544
W69: 6.14@83.515,90.424 T1.12 | length 131.2
  Top Layer w0.3: v1(83.515,88.9) 6.14@83.515,90.424 ; T1.12@182.796,97.23 T1.12@182.796,97.561 ; v1(187.858,81.737) 187.871,81.75 187.871,88.151 v1(187.884,88.163)
  Bottom Layer w0.3: v1(83.515,88.9) 83.515,82.372 84.42,81.467 145.029,81.467 145.044,81.483 173.827,81.483 173.843,81.499 174.34,81.499 174.356,81.483 187.604,81.483 v1(187.858,81.737) ; T1.12@182.796,97.561 182.796,95.867 187.884,90.78 v1(187.884,88.163)
W70: 6.13@84.785,90.424 T1.32 | length 130.9
  Top Layer w0.3: v1(84.785,88.697) 6.13@84.785,90.424 ; v1(188.57,82.728) 188.57,88.9 v1(188.595,88.925)
  Bottom Layer w0.3: v1(84.785,88.697) 84.785,83.427 85.383,82.829 187.107,82.829 187.208,82.728 v1(188.57,82.728) ; T1.32@182.796,100.101 183.03,99.867 183.03,99.291 184.048,98.273 184.048,95.479 188.595,90.932 v1(188.595,88.925)
W71: 6.12@86.055,90.424 M1.32 | length 40.6
  Top Layer w0.3: v1(86.055,88.951) 6.12@86.055,90.424
  Bottom Layer w0.3: v1(86.055,88.951) 86.055,90.145 86.801,90.89 104.162,90.89 105.435,92.163 112.737,92.163 117.17,96.596 117.17,99.06 118.211,100.101 M1.32@118.407,100.101
W72: 6.11@87.325,90.424 B1.32 | length 85.9
  Top Layer w0.254: 6.11@87.3,90.399 6.11@87.325,90.424
  Top Layer w0.3: v1(33.757,87.097) 33.909,87.249 35.587,87.249 35.79,87.046 86.792,87.046 87.325,87.579 87.325,90.373 6.11@87.3,90.399
  Bottom Layer w0.3: v1(33.757,87.097) 33.757,93.389 36.354,95.987 50.419,95.987 51.511,97.079 51.511,98.814 B1.32@52.799,100.101
W73: 7.18@92.532,90.348 B1.13 | length 42.3
  Top Layer w0.254: 7.18@92.532,89.662 7.18@92.532,90.348
  Top Layer w0.3: B1.13@55.339,97.561 55.339,96.299 56.973,94.665 60.73,94.665 60.97,94.425 71.185,94.425 72.705,92.905 80.246,92.905 81.204,91.948 92.126,91.948 92.532,91.542 7.18@92.532,90.348
W74: 7.17@93.802,90.348 M1.13 | length 33.8
  Top Layer w0.254: v1(93.777,88.951) 93.777,90.322 7.17@93.802,90.348
  Top Layer w0.3: M1.13@120.947,97.063 M1.13@120.947,97.764
  Bottom Layer w0.254: v1(93.777,88.951) 93.777,89.662 94.028,89.913 104.696,89.913 105.969,91.186 113.349,91.186 118.023,95.86 120.421,95.86 121.031,96.469 M1.13@121.031,97.231 ; M1.13@121.031,97.587 M1.13@121.031,97.739
W75: 7.16@95.072,90.348 T1.13 | length 116.2
  Top Layer w0.254: 7.16@95.072,90.348 95.072,88.06 96.148,86.985 103.212,86.985 103.985,87.757 109.474,87.757 v1(109.753,87.478) ; v1(189.255,88.113) 189.255,84.582 v1(189.281,84.557)
  Bottom Layer w0.254: v1(109.753,87.478) 109.779,87.452 109.779,84.328 110.346,83.76 159.367,83.76 160.588,84.981 161.424,84.981 162.035,84.371 174.414,84.371 174.592,84.549 176.203,84.549 176.21,84.557 v1(189.281,84.557)
  Bottom Layer w0.3: T1.13@185.336,97.561 185.336,94.898 189.255,90.979 v1(189.255,88.113)
W76: 7.15@96.342,90.348 T1.33 | length 118
  Top Layer w0.3: 7.15@96.342,90.348 96.342,88.011 96.34,88.011 96.889,87.462 103.015,87.462 103.787,88.234 108.031,88.234 108.113,88.316 v1(109.906,88.316) ; v1(189.89,88.849) 189.89,85.192 v1(189.916,85.166)
  Bottom Layer w0.254: T1.33@185.336,99.739 T1.33@185.336,100.101
  Bottom Layer w0.3: v1(109.906,88.316) 110.6,87.621 110.6,84.52 110.883,84.237 159.169,84.237 160.39,85.458 162.065,85.458 162.535,84.988 173.99,84.988 174.168,85.166 v1(189.916,85.166) ; T1.33@185.336,100.101 186.538,98.9 186.538,94.488 189.89,91.135 v1(189.89,88.849)
W77: 7.14@97.612,90.348 M1.33 | length 33.6
  Top Layer w0.3: v1(97.587,88.925) 97.599,88.938 97.599,90.335 7.14@97.612,90.348 7.14@97.671,90.289
  Bottom Layer w0.3: v1(97.587,88.925) 97.641,88.925 98.103,89.388 104.958,89.388 106.279,90.709 113.547,90.709 118.156,95.318 121.48,95.318 122.377,96.215 122.377,98.577 M1.33@121.031,99.924
W78: 7.13@98.882,90.348 B1.33 | length 50.4
  Top Layer w0.254: 7.13@98.882,89.764 7.13@98.882,90.348
  Top Layer w0.3: B1.33@55.339,100.101 56.54,98.9 56.54,96.215 57.59,95.165 60.937,95.165 61.177,94.925 71.392,94.925 72.912,93.405 80.713,93.405 81.67,92.448 92.333,92.448 92.935,91.846 98.527,91.846 98.882,91.491 7.13@98.882,90.348
W79: 7.12@100.152,90.348 B1.14 | length 47.8
  Top Layer w0.254: 7.12@100.152,89.713 7.12@100.152,90.348
  Top Layer w0.3: B1.14@57.879,97.561 58.007,97.433 58.007,96.044 58.386,95.665 61.144,95.665 61.384,95.425 71.599,95.425 73.119,93.905 80.92,93.905 81.877,92.948 92.54,92.948 93.142,92.346 99.932,92.346 100.152,92.126 7.12@100.152,90.348
W80: 7.11@101.422,90.348 M1.14 | length 30.2
  Top Layer w0.3: v1(101.422,88.062) 7.11@101.422,90.348 ; M1.14@123.487,97.096 M1.14@123.487,97.764
  Bottom Layer w0.3: v1(101.422,88.062) 102.21,87.274 103.552,87.274 106.486,90.209 113.754,90.209 118.363,94.818 121.971,94.818 123.622,96.469 123.622,97.333 M1.14@123.571,97.384
W81: 14.18@190.729,90.322 T1.14 | length 8.4
  Top Layer w0.3: T1.14@187.876,97.561 190.729,94.709 14.18@190.729,90.322
W82: 14.17@191.999,90.322 T1.34 | length 11.5
  Top Layer w0.254: T1.34@187.876,100.101 189.154,98.823 189.154,97.282 191.999,94.437 14.17@191.999,90.322
W83: 14.16@193.269,90.322 M1.34 | length 108.9
  Top Layer w0.3: M1.34@123.571,100.127 123.571,100.762 124.892,102.083 127.188,102.083 127.757,102.651 155.654,102.651 155.975,102.972 195.123,102.972 196.799,101.295 196.799,97.003 202.438,91.364 202.438,86.716 199.72,83.998 193.444,83.998 193.269,84.174 14.16@193.269,90.322
W84: 14.15@194.539,90.322 B1.34 | length 205.7
  Top Layer w0.254: 14.15@194.539,89.713 14.15@194.539,90.322
  Top Layer w0.3: v1(34.417,85.827) v1@34.547,85.827 ; v1@34.493,85.785 67.792,85.785 68.128,86.122 68.625,86.122 68.864,85.883 145.99,85.883 146.523,86.415 148.701,86.415 149.143,85.973 154.768,85.973 155.809,84.932 159.557,84.932 160.198,85.573 v1(160.198,86.081) ; v1(194.412,85.598) 194.412,85.652 194.539,85.779 194.539,89.7 14.15@194.526,89.713
  Bottom Layer w0.3: v1(34.417,85.827) 34.366,85.877 34.366,92.964 36.703,95.301 52.807,95.301 54.127,96.622 54.127,101.194 55.067,102.133 56.82,102.133 57.645,101.309 57.645,100.335 B1.34@57.879,100.101 ; v1(160.198,86.081) 160.32,85.958 162.272,85.958 162.742,85.488 173.783,85.488 174.061,85.766 194.243,85.766 v1(194.412,85.598)
W85: 14.14@195.809,90.322 B1.15 | length 152.8
  Top Layer w0.254: B1.15@60.419,97.561 61.722,98.864 61.722,101.422 62.496,102.196 81.7,102.196 87.447,96.449 94.457,96.449 95.175,95.731 101.334,95.731 102.336,94.729 107.867,94.729 108.082,94.513 114.172,94.513 114.953,93.732 122.37,93.732 123.036,93.066 129.286,93.066 129.674,92.677 162.745,92.677 v1(162.865,92.558) ; v1(195.682,86.436) 195.809,86.563 14.14@195.809,90.322
  Bottom Layer w0.254: v1(162.865,92.558) 163.703,91.719 163.703,86.03 173.65,86.03 173.863,86.243 195.489,86.243 v1(195.682,86.436)